# EAGLE board Rev5 (EAGLE 6.5.0)
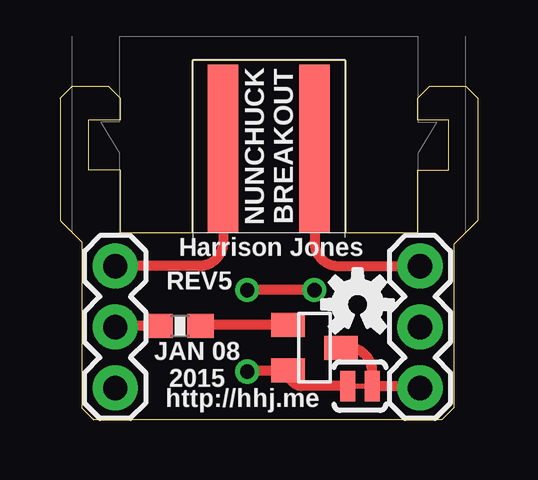
[diagram p0: board, top side]
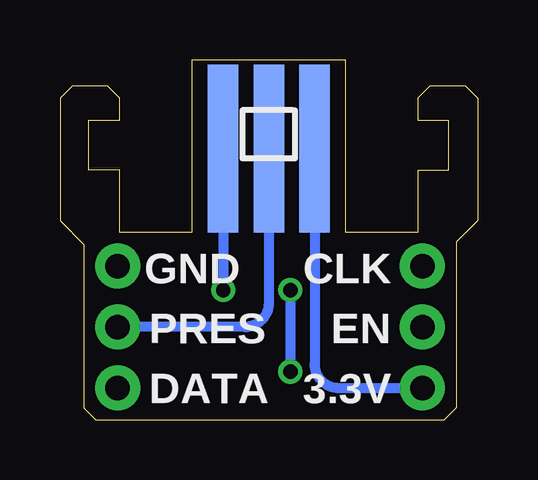
[diagram p1: board, bottom side, seen from below]

Size 17.4 x 15 mm. Coordinates in mm from the lower left corner, seen from the top.
Outline: 0,13.4 0,8.3 0.9,7.4 0.9,0.5 1.4,0 15.9,0 16.4,0.5 16.4,7.3 17.4,8.3 17.4,13.4 16.9,13.9 15.4,13.9 14.9,13.4 14.9,12.5 16.2,12.5 16.2,10.4 14.9,10.4 14.9,7.8 11.9,7.8 11.9,15 5.5,15 5.5,7.8 2.5,7.8 2.5,10.4 1.2,10.4 1.2,12.5 2.5,12.5 2.5,13.4 2,13.9 0.5,13.9 0,13.4
Copper layers (1*16): Top 0.035mm / dielectric 1.5mm / Bottom 0.035mm
Design rules "default": minimum track width 10mil, minimum drill 0.6mm, track to track 8mil, track to pad 8mil, pad to pad 8mil, via to via 8mil, smd to smd 8mil, copper to edge 40mil, drill to drill 8mil, minimum pad ring 10mil, minimum via ring 8mil, stop-mask expansion 4mil, vias tented up to drill 0mil, thermal gap 10mil

## Footprints (pad centres in the part's own frame; a part is rotated, then mirrored left to right if it is on the bottom)
1X03 = drill 1.016 pad 1.88: 1 0,0; 2 2.54,0; 3 5.08,0
SOT23 = smd 1 x 1.4: 1 -0.95,-1.1; 2 0.95,-1.1; 3 0,1.1
0603-RES = smd 1.1 x 1: 1 -0.85,0; 2 0.85,0
SJ_2S-TRACE = smd 0.635 x 1.27: 1 -0.508,0; 2 0.508,0
NUNCHUCK-LOCK = smd 1.27 x 6.985 bottom: 3.3V -1.905,1.5; DATA 1.905,1.5; PRESENCE 0,1.5 | smd 1.27 x 6.985: CLK -1.905,1.5; GND 1.905,1.5

## Placement (x,y rotation side)
JP1  [1X03]  2.3,6.4 270 top
JP2  [1X03]  15,6.4 270 top
LOGO1  OSHW-LOGOS  [OSHW-LOGO-S]  12.4,4.8 0 top
Q1  [SOT23]  10.6,3 270 top
R1  [0603-RES]  5,3.9 0 top
SJ1  NC  [SJ_2S-TRACE]  12.5,1.4 0 top
U$1  NUNCHUCKLOCL  [NUNCHUCK-LOCK]  8.7,9.8 0 top
U$2  DOC_FIELD  [DOC_FIELD]  8.5,-1 0 top

## Library data of the parts
JP1 JP2 = SparkFun-Connectors
LOGO1 = SparkFun-Aesthetics
Q1 = SparkFun-DiscreteSemi
R1 = SparkFun-Resistors
SJ1 = SparkFun-Passives
U$1 U$2 = HHJ

## Nets
3.3V: JP1.3 U$1.3.3V
EN: JP1.2 R1.1
GND: JP2.1 U$1.GND
N$1: Q1.1 R1.2
N$6: JP2.3 Q1.3 SJ1.2
PRES: JP2.2 U$1.PRESENCE
SCL: JP1.1 U$1.CLK
SDA: Q1.2 SJ1.1 U$1.DATA

## Tracks (layer width: path | path; a pad name or v marks a point on that pad's centre or on a via)
3.3V
  Bottom 0.406: U$1.3.3V 6.79,2.32 arc-90 5.79,1.32 JP1.3
EN
  Top 0.406: R1.1 2.34,3.9 arc90 JP1.2
GND
  Top 0.406: U$1.GND 10.61,7.4 arc90 11.61,6.4 JP2.1
N$1
  Top 0.406: Q1.1 5.9,3.95 arc90 R1.2
N$6
  Top 0.406: JP2.3 arc90 14.92,1.4 SJ1.2 13.01,2 arc90 12.01,3 Q1.3
PRES
  Bottom 0.406: U$1.PRESENCE 8.7,4.86 arc90 9.7,3.86 JP2.2
SCL
  Top 0.406: U$1.CLK 6.79,7.4 arc-90 5.79,6.4 JP1.1
SDA  (via drill 0.6)
  Top 0.406: SJ1.1 10.05,1.4 arc-90 Q1.2 | 9.6,2.05 Q1.2 | v10.6,5.4 v7.8,5.4 | v7.8,2 arc-90 7.95,2.05 Q1.2
  Bottom 0.406: U$1.DATA v10.61,5.41 arc-90 v10.6,5.4 | v7.8,5.4 v7.8,2

## Text on the board
tPlace: NUNCHUCK / BREAKOUT | Harrison Jones | REV5 | JAN 08 / 2015 | http://hhj.me
bPlace: CLK | GND | EN | PRES | 3.3V | DATA